# EAGLE board procesor-attiny84 (EAGLE 7.2.0)
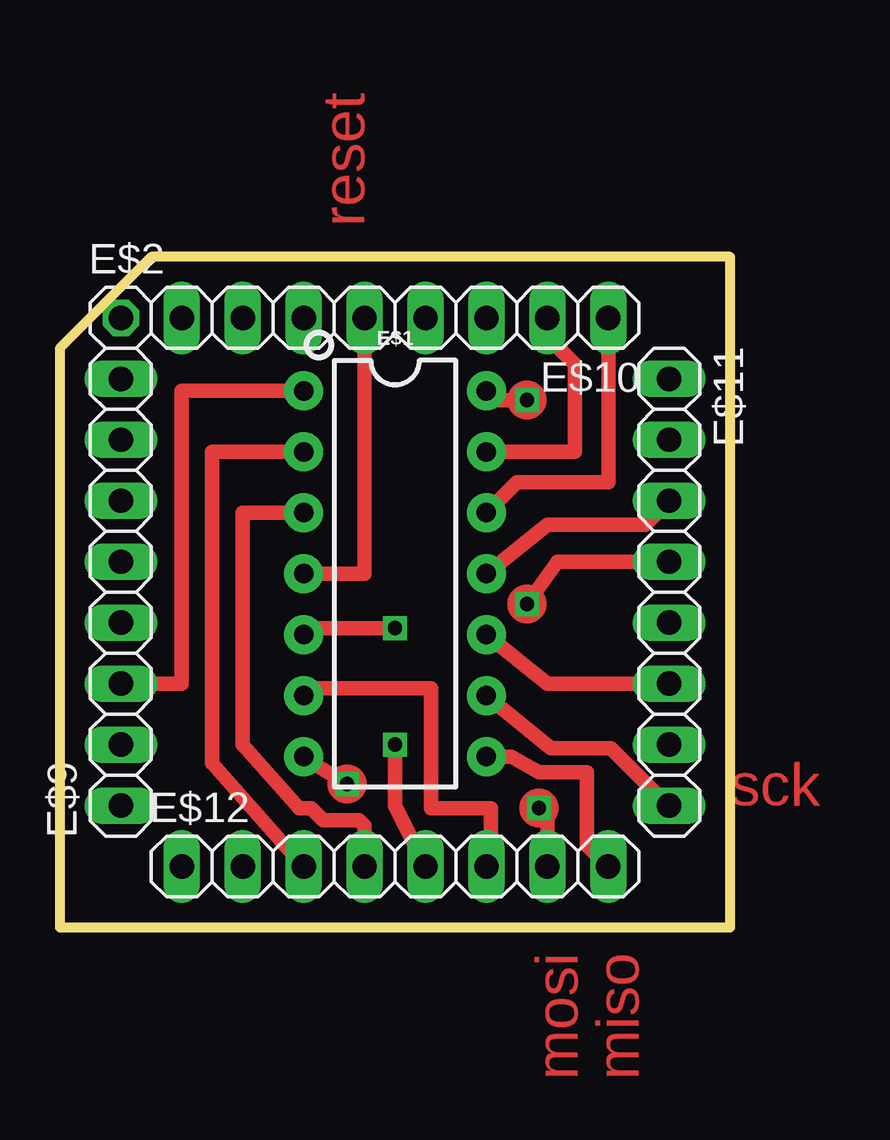
[diagram p0: board, top side]
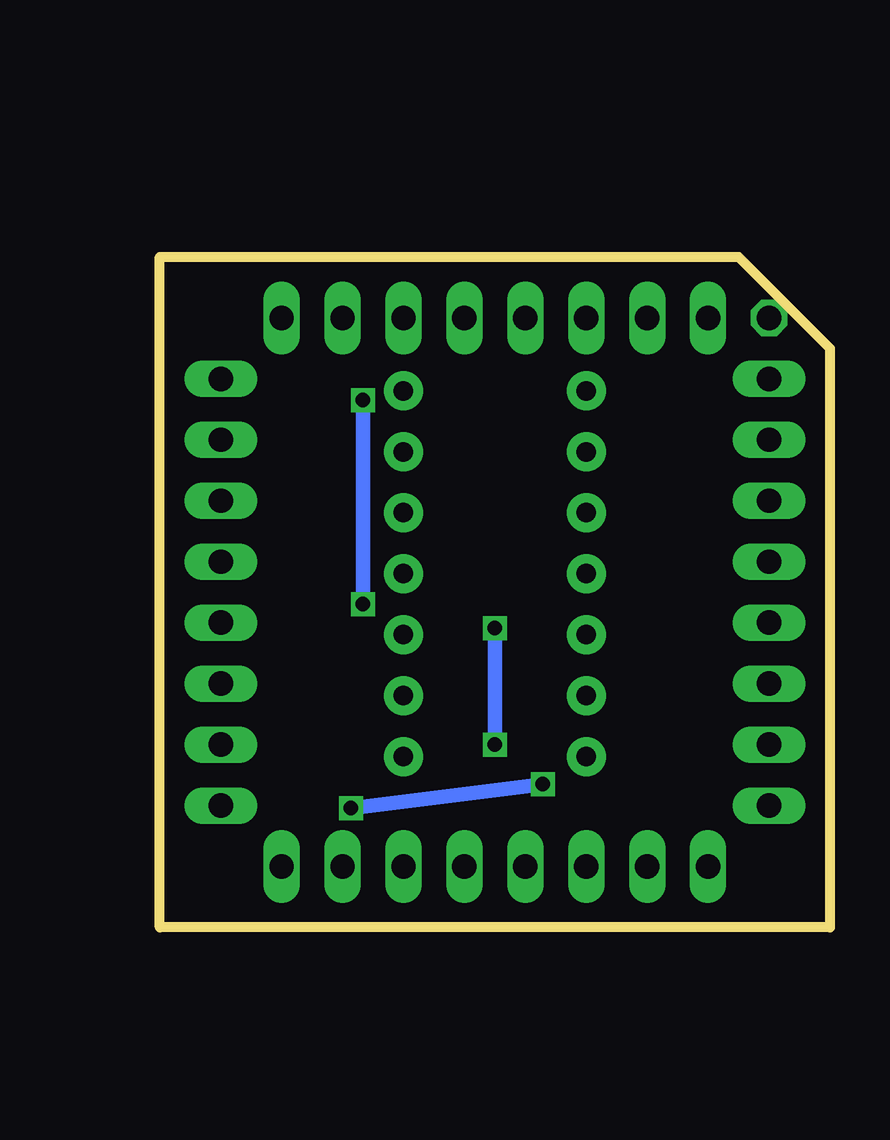
[diagram p1: board, bottom side, seen from below]

Size 27.94 x 27.94 mm. Coordinates in mm from the lower left corner, seen from the top.
Outline: 3.81,27.94 0,24.13 0,0 27.94,0 27.94,27.94 3.81,27.94
Copper layers (1*16): Top 0.035mm / dielectric 1.5mm / Bottom 0.035mm
Design rules "default": minimum track width 10mil, minimum drill 24mil, track to track 8mil, track to pad 8mil, pad to pad 8mil, via to via 8mil, smd to smd 8mil, copper to edge 40mil, drill to drill 8mil, minimum pad ring 10mil, minimum via ring 8mil, stop-mask expansion 4mil, vias tented up to drill 0mil, thermal gap 10mil

## Footprints (pad centres in the part's own frame; a part is rotated, then mirrored left to right if it is on the bottom)
DIP14 = drill 0.813 pad 1.626: 1 -7.62,-3.81; 2 -5.08,-3.81; 3 -2.54,-3.81; 4 0,-3.81; 5 2.54,-3.81; 6 5.08,-3.81; 7 7.62,-3.81; 8 7.62,3.81; 9 5.08,3.81; 10 2.54,3.81; 11 0,3.81; 12 -2.54,3.81; 13 -5.08,3.81; 14 -7.62,3.81
1X01 = drill 1.016 octagon: 1 0,0
1X08 = drill 1.016 long: 1 -8.89,0; 2 -6.35,0; 3 -3.81,0; 4 -1.27,0; 5 1.27,0; 6 3.81,0; 7 6.35,0; 8 8.89,0

## Placement (x,y rotation side)
E$1  [DIP14]  13.97,14.74 270 top
E$2  [1X01]  2.54,25.4 0 top
E$9  [1X08]  2.54,13.97 90 top
E$10  [1X08]  13.97,25.4 180 top
E$11  [1X08]  25.4,13.97 270 top
E$12  [1X08]  13.97,2.54 0 top

## Library data of the parts
E$1 = SparkFun-IC-Microcontroller
E$2 E$9-E$12 = pinhead

## Nets
S$2: E$1.4 E$10.5
S$3: E$1.14 E$11.4
S$4: E$1.1 E$9.3
S$5: E$1.9 E$11.8
S$6: E$1.12 E$10.1
S$7: E$1.13 E$10.2
S$8: E$1.7 E$12.7
S$10: E$1.8 E$12.8
S$11: E$1.10 E$11.6
S$12: E$1.11 E$11.3
S$13: E$1.2 E$12.3
S$14: E$1.3 E$12.4
S$15: E$1.5 E$12.5
S$18: E$1.6 E$12.6

## Tracks (layer width: path | path; a pad name or v marks a point on that pad's centre or on a via)
S$2
  Top 0.61: E$1.4 12.7,14.74 E$10.5
S$3  (via drill 0.6)
  Top 0.61: E$11.4 20.74,15.24 v19.47,13.47 | v19.47,21.97 17.67,21.97 E$1.14
  Bottom 0.61: v19.47,13.47 v19.47,21.97
S$4
  Top 0.61: E$1.1 5.08,22.36 5.08,10.16 E$9.3
S$5
  Top 0.61: E$11.8 25.36,5.08 22.97,7.47 20.47,7.47 E$1.9
S$6
  Top 0.61: E$1.12 19.05,18.55 22.86,18.55 E$10.1
S$7
  Top 0.61: E$1.13 21.47,19.82 21.47,23.47 20.32,24.62 E$10.2
S$8  (via drill 0.6)
  Top 0.61: E$1.7 10.66,6.78 v11.97,5.97 | E$12.7 20.32,4.62 v19.97,4.97
  Bottom 0.61: v11.97,5.97 v19.97,4.97
S$10
  Top 0.61: E$1.8 18.82,7.12 19.97,6.47 21.97,6.47 21.97,3.43 E$12.8
S$11
  Top 0.61: E$11.6 20.32,10.16 E$1.10
S$12
  Top 0.61: E$1.11 20.32,16.78 24.4,16.78 E$11.3
S$13
  Top 0.61: E$12.3 6.35,6.85 6.35,19.82 E$1.2
S$14
  Top 0.61: E$1.3 7.62,17.28 7.62,7.62 9.97,4.97 10.47,4.97 10.97,4.47 12.47,4.47 12.7,4.24 E$12.4
S$15  (via drill 0.6)
  Top 0.61: E$12.5 13.97,5.08 v13.97,7.62 | E$1.5 10.43,12.47 v13.97,12.47
  Bottom 0.61: v13.97,12.47 v13.97,7.62
S$18
  Top 0.61: E$12.6 17.97,2.73 17.97,4.97 15.47,4.97 15.47,9.97 10.16,9.97 E$1.6
(copper drawn outside any net)
  shapes: Top circle x4

## Text on the board
Top: reset | sck | mosi | miso